# Altium PCB nrf52840_bma250e.PcbDoc
Units mm, origin at the board's own origin, x right, y up, seen from the top; angles counter-clockwise.
Board outline 19 x 51.31 mm, 2 copper layers (Top Layer, Bottom Layer), stack 0.325 mm thick; 26 components, 60 nets, 138 pads, 59 vias.
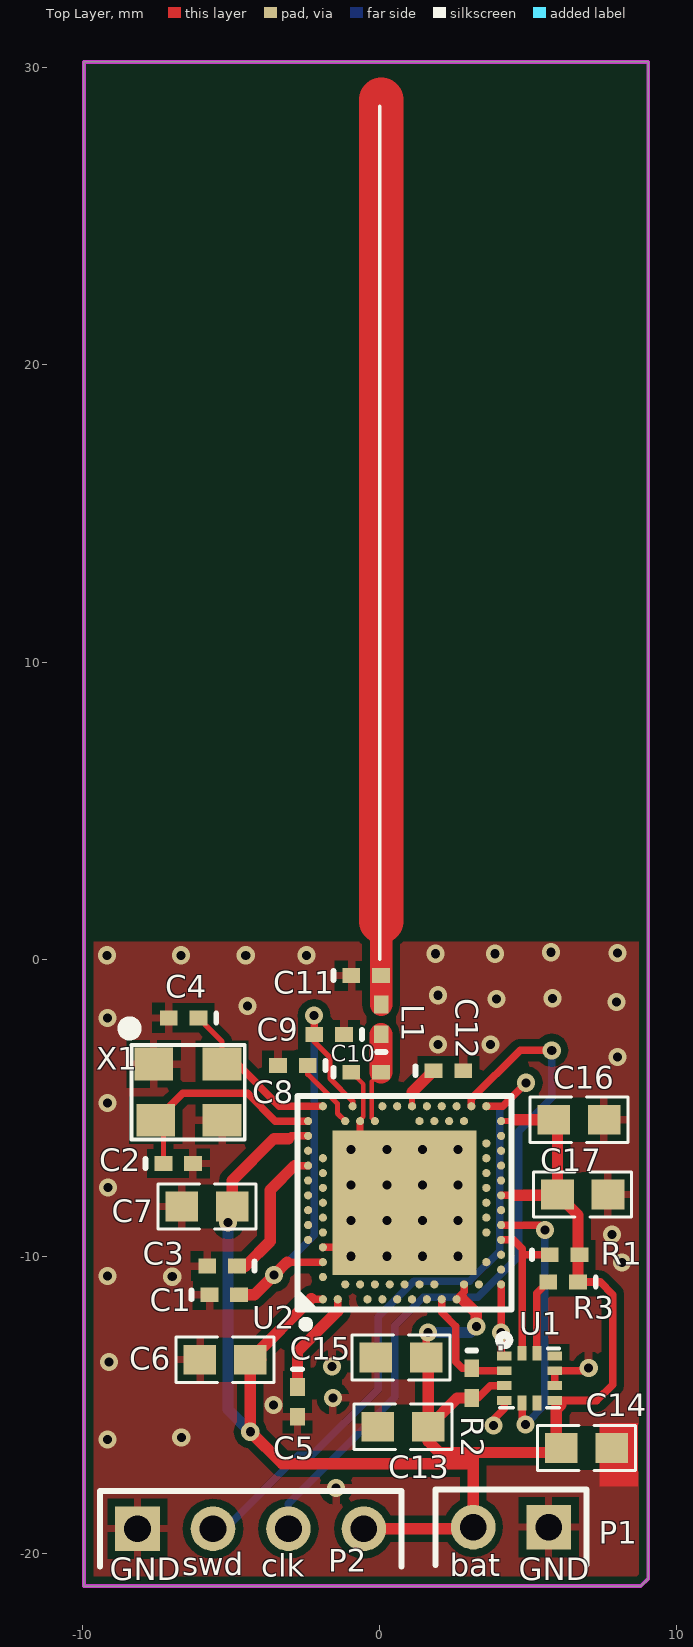
[diagram p0: Top Layer view]
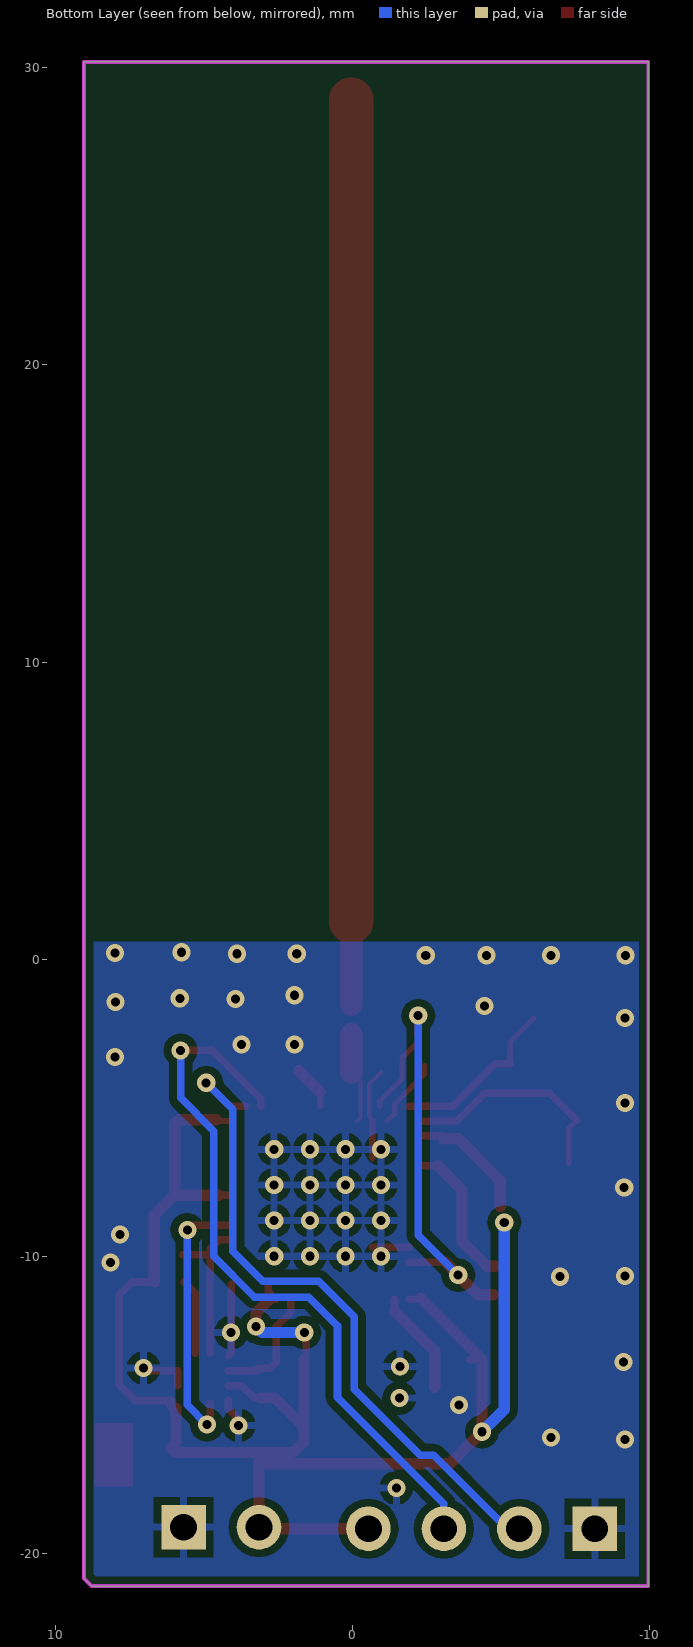
[diagram p1: Bottom Layer view, seen from below]

## Layer stack, top to bottom
Top Solder: solder mask 0.0102, Solder Resist, Dk 3.5
Top Layer: signal copper 0.0356
Dielectric 1: core 0.254, FR-4, Dk 4.2
Bottom Layer: signal copper 0.0356
Bottom Solder: solder mask 0.0102, Solder Resist, Dk 3.5

## Board outline
-9.957,-21.107 -9.957,30.201 9.043,30.201 9.043,-20.853 8.788,-21.107

## Design rules (kind name [scope] priority, off if disabled: settings)
Clearance [All] p1: gap=0.145
ComponentClearance [All] p1 off: gap=0.254 collisioncheckmode=3 verticalgap=0.254 showdistances=FALSE
Height [All] p1 off: minheight=0 maxheight=25.4 prefheight=12.7
MinimumSolderMaskSliver [All] p1 off: minsoldermaskwidth=0.254
NetAntennae [All] p1 off: netantennaetolerance=0
PolygonConnect [All] p1: connectstyle=Relief reliefconductorwidth=0.254 reliefentries=4 polygonreliefangle="90 Angle" airgapwidth=0.254
RoutingVias [All] p1: holewidth=0.711 width=1.27 viastyle="Through Hole" minholewidth=0.711 minwidth=1.27 maxholewidth=0.711 maxwidth=1.27
SilkToSilkClearance [All] p1 off: silktosilkclearance=0.254
SilkToSolderMaskClearance [IsPad] p1 off: minsilkscreentomaskgap=0.254 clearancetoexposedcopper=TRUE
SolderMaskExpansion [All] p1: expansion=0.102
Width [All] p1: maxlimit=2.54 minlimit=0.025 preferedwidth=0.254 minimp=50.000000 maximp=50.000000 favimp=50.000000
24 further rules are at their usual default settings.

## Components (designator, comment, footprint, x,y, rotation, side; value= is the part's Value field where it differs from the comment)
C1 "1.0µF" 0402-A -5.232,-11.303 r0 top
C2 "12pF" 0402-A -6.782,-6.883 r0 top
C3 "N.C." 0402-A -5.309,-10.338 r180 top
C4 "12pF" 0402-A -6.604,-1.981 r180 top
C5 "100nF" 0402-A -2.769,-14.91 r270 top
C6 "1.0µF" 0603-1 -5.207,-13.487 r180 top
C7 "100nF" 0603-1 -5.817,-8.331 r180 top
C8 "100pF" 0402-A -2.921,-3.581 r180 top
C9 "N.C." 0402-A -1.702,-2.54 r180 top
C10 "0.8pF" 0402-A -0.457,-3.81 r0 top
C11 "0.5pF" 0402-A -0.457,-0.559 r0 top
C12 "820pF" 0402-A 2.311,-3.759 r0 top
C13 "0.1uF" 0603-1 0.787,-15.748 r180 top
C14 "1uF" 0603-1 6.96,-16.459 r180 top
C15 "4.7µF" 0603-1 0.711,-13.411 r180 top
C16 "100nF" 0603-1 6.706,-5.41 r0 top
C17 "100nF" 0603-1 6.833,-7.925 r0 top
L1 "4.7nH" 0402-A 0.051,-2.032 r90 top
P1 "Header 2" HDR1X2 5.69,-19.126 r180 top
P2 "Header 4" HDR1X4 -8.153,-19.177 r0 top
R1 "10K" 0402-A 6.223,-9.957 r0 top
R2 "10K" 0402-A 3.099,-14.275 r270 top
R3 "10K" 0402-A 6.172,-10.871 r180 top
U1 "bma250e" bma250e 4.191,-13.36 r0 top
U2 "nRF52840-QIAA" AQFN50P700X700X85_HS-74N 0.838,-8.204 r90 top
X1 "32MHz" SMD3225 -5.309,-3.531 r180 top

## Footprints (in the part's own frame and the unit in brackets; to place one, negate y for a bottom-side part, rotate by r counter-clockwise, add the part's x,y. Pads: shape width x height; smd on the part's side, far side on the other; paste and mask are expansions set on the pad)
0402-A [mm] "Chip Inductor; Body 1 x 0.5 mm (LxW typ)"
  rect 0.6x0.5 smd: 1(-0.5,0) 2(0.5,0)
  silkscreen extent -1.1,-0.15 -1.1,0.15
0603-1 [mm] "贴片带丝印"
  rect 1.1x1 smd: 1(-0.85,0) 2(0.85,0)
  silkscreen extent -1.65,-0.76 1.65,0.76, body extent -1.14,-0.38 1.14,0.38, height 1
AQFN50P700X700X85_HS-74N [mm]
  rect 4.85x4.85 smd mask+0.05: 74(0,0)
  round 0.275 smd paste+0.012 mask+0.05: A8(-1.25,3.25) A10(-0.75,3.25) A12(-0.25,3.25) A14(0.25,3.25) A16(0.75,3.25) A18(1.25,3.25) A20(1.75,3.25) A22(2.25,3.25) A23(2.75,3.25) AA24(3.25,-2.25) AB2(-2.75,-2.5) AC5(-2,-2.75) AC9(-1,-2.75) AC11(-0.5,-2.75) AC13(0,-2.75) AC15(0.5,-2.75) AC17(1,-2.75) AC19(1.5,-2.75) AC21(2,-2.75) AC24(3.25,-2.75) AD2(-2.75,-3.25) AD4(-2.25,-3.25) AD6(-1.75,-3.25) AD8(-1.25,-3.25) AD10(-0.75,-3.25) AD12(-0.25,-3.25) AD14(0.25,-3.25) AD16(0.75,-3.25) AD18(1.25,-3.25) AD20(1.75,-3.25) AD22(2.25,-3.25) AD23(2.75,-3.25) B1(-3.25,2.75) B3(-2.5,2.75) B5(-2,2.75) B7(-1.5,2.75) B9(-1,2.75) B11(-0.5,2.75) B13(0,2.75) B15(0.5,2.75) B17(1,2.75) B19(1.5,2.75) B24(3.25,2.75) C1(-3.25,2.25) D2(-2.75,2) D23(2.75,2) E24(3.25,1.75) F2(-2.75,1.5) F23(2.75,1.5) G1(-3.25,1.25) H2(-2.75,1) H23(2.75,1) J1(-3.25,0.75) J24(3.25,0.75) K2(-2.75,0.5) L1(-3.25,0.25) L24(3.25,0.25) M2(-2.75,0) N1(-3.25,-0.25) N24(3.25,-0.25) P2(-2.75,-0.5) P23(2.75,-0.5) R1(-3.25,-0.75) R24(3.25,-0.75) T2(-2.75,-1) T23(2.75,-1) U1(-3.25,-1.25) U24(3.25,-1.25) V23(2.75,-1.5) W1(-3.25,-1.75) W24(3.25,-1.75) Y2(-2.75,-2) Y23(2.75,-2)
  silkscreen extent -4.21,-3.6 3.6,3.6, body extent -3.55,-3.55 3.55,3.55, height 0.85
bma250e [mm]
  rect 0.5x0.3 smd: 1(0,0) 2(0,-0.5) 3(0,-1) 4(0,-1.5) 7(1.7,-1.5) 8(1.7,-1) 9(1.7,-0.5) 10(1.7,0)
  rect 0.3x0.5 smd: 5(0.6,-1.59) 6(1.1,-1.59) 11(1.1,0.09) 12(0.6,0.09)
  silkscreen extent -0.15,-1.75 1.85,0.25
HDR1X2 [mm] "Connector; Header; 2 Position"
  rect 1.5x1.5 hole 0.9: 1(0,0)
  round 1.5 hole 0.9: 2(2.54,0)
  silkscreen extent -1.27,-1.27 3.81,1.27
HDR1X4 [mm] "Connector; Header; 4 Position"
  rect 1.5x1.5 hole 0.9: 1(0,0)
  round 1.5 hole 0.9: 2(2.54,0) 3(5.08,0) 4(7.62,0)
  silkscreen extent -1.27,-1.27 8.89,1.27
SMD3225 [mm]
  rect 1.3x1.1 smd: 1(0,0) 2(2.3,0) 3(2.23,1.9) 4(0,1.9)
  silkscreen extent -0.76,-1.32 3.24,2.54

## Part data
C1 C6: library part C0603-1μ0, "Capacitor, X7R, ±10%"
C2 C4: library part C0402-12p, "Capacitor, NP0, ±2%"
C3 C9: library part C0402-N.C., "Not mounted"
C5 C7 C16 C17: library part C0402-100n, "Capacitor, X7R, ±10%"
C8: library part C0402-100p, "Capacitor, NP0, ±5%"
C10: library part C0402-0.8p, "Capacitor, NP0, ±10%"
C11 C13 C14: library part C0402-0.5p, "Capacitor, NP0, ±10%"
C12: library part C0402-820p, "Capacitor, NP0, ±5%"
C15: library part C0603-4μ7-6.3V-X7R, "Capacitor, X7R, ±10%"
L1: library part L0402-4n7, "High frequency chip inductor ±5%"
P1: "Header, 2-Pin"
P2: "Header, 4-Pin"
R1 R2 R3: library part Res1, "Resistor"
U2: library part nRF52840-QIAAD0, "Multi-protocol Bluetooth Low Energy, IEEE 802.15.4, ANT and 2.4GHz proprietary system-on-chip"
X1: library part XTAL_SMD2016_32MHz_8pF_General, "XTAL SMD 2016, 32MHz, Cl=8pF, Total Tol: ±40ppm"

## Via types
v1: diameter 0.61, hole 0.305, Top Layer to Bottom Layer, 56 vias
v2: diameter 0.61, hole 0.305, Top Layer to Bottom Layer, tented both sides, 3 vias

## Nets (pads, with @x,y where several pads share a name; then routed paths per layer and width w, separated by ;. In a path a pad name is that pad's centre, name@x,y a point inside that pad or via, vN(x,y) a via of type N, cw(c..) or ccw(c..) an arc to the next point about the centre after c; other vN are vias at no path point)
DEC1: C5.1 U2.C1 | length 3.5
  Top Layer w0.254: -1.412,-11.851 U2.C1
  Top Layer w0.381: C5.1 -2.769,-13.208 -1.412,-11.851
DEC3: C8.1 U2.D23 | length 2.4
  Top Layer w0.178: C8.1 -2.421,-3.873 -1.422,-4.872 -1.422,-5.194 U2.D23
DEC4_6: C1.2 C9.2 U2.B5 U2.E24 | length 16.1
  Top Layer w0.178: C9.2 -2.202,-2.794 -1.676,-3.319 -1.676,-4.021 -0.912,-4.785 U2.E24
  Top Layer w0.254: -3.118,-10.204 U2.B5 ; C9.2 v1@-2.202,-1.913
  Top Layer w0.381: C1.2 -4.216,-11.303 v1(-3.556,-10.643) -3.118,-10.204
  Bottom Layer w0.254: v1(-3.556,-10.643) -2.21,-9.296 v1(-2.21,-1.905)
GND: C1.1 C2.2 C3.2 C4.2 C5.2 C6.2 C7.2 C8.2 C9.1 C10.1 C11.1 C12.2 C13.2 C14.1 C15.2 C16.2 C17.2 P1.1 P2.1 U1.1 U1.4 U1.8 U1.9 U2.74 U2.AD2 U2.B7 U2.F23 X1.2 X1.4 | length 9.5
  Top Layer w0.145: C10.1 -0.557,-4.21 -0.557,-5.309 -0.662,-5.414 U2.F23
  Top Layer w0.229: U2.74@-0.662,-6.704 U2.F23
  Top Layer w0.254: U2.B7 U2.74@-0.662,-9.704 ; v1(3.835,-15.697) 3.835,-15.494 4.191,-15.138 U1.4 ; U2.AD2 4.088,-13.258 U1.1 ; U1.8 U1.9 6.942,-13.86 v1(7.036,-13.767)
  other v1: -1.473,-17.805 -9.169,-16.18 -6.68,-16.104 -3.581,-15.011 -1.575,-14.783 -1.6,-13.716 -9.119,-13.564 4.088,-12.573 -6.985,-10.693 -9.169,-10.668 8.153,-10.211 -0.962,-10.004 0.238,-10.004 1.438,-10.004 2.638,-10.004 7.823,-9.271 -0.962,-8.804 0.238,-8.804 1.438,-8.804 2.638,-8.804 -9.144,-7.696 -0.962,-7.604 0.238,-7.604 1.438,-7.604 2.638,-7.604 -0.962,-6.404 0.238,-6.404 1.438,-6.404 2.638,-6.404 -9.169,-4.851 8.001,-3.302 1.956,-2.87 3.734,-2.87 -9.169,-1.981 -4.445,-1.575 7.976,-1.448 3.937,-1.346 5.817,-1.321 1.956,-1.219 -2.464,0.127 1.88,0.178 3.886,0.178 8.001,0.203 5.766,0.229
  other v2: -9.185,0.127 -6.685,0.127 -4.51,0.127
NetC3_1: C3.1 U2.A18 | length 4.8
  Top Layer w0.254: -2.865,-6.954 U2.A18
  Top Layer w0.381: C3.1 -4.521,-10.338 -3.683,-9.5 -3.683,-7.772 -2.865,-6.954
NetC10_2: C10.2 L1.1 U2.H23 | length 3.1
  Top Layer w0.145: U2.H23 -0.267,-5.349 -0.267,-4.12 C10.2
  Top Layer w0.762: C10.2 L1.1@0.043,-2.54
NetC12_1: C12.1 U2.N24 | length 1.5
  Top Layer w0.203: U2.N24 1.088,-4.482
  Top Layer w0.381: 1.088,-4.482 C12.1
NetR3_2: R3.2 U1.11 | length 2.6
  Top Layer w0.254: U1.11 5.291,-11.252 R3.2
P0.02/AIN0: U2.A12
P0.03/AIN1: U2.B13
P0.04/AIN2: U2.J1
P0.05/AIN3: U2.K2
P0.06: U2.L1
P0.07: U2.M2
P0.08: U2.N1
P0.09/NFC1: U2.L24
P0.10/NFC2: U2.J24
P0.11: U2.T2
P0.12: R2.1 U1.2 U2.U1 | length 4
  Top Layer w0.254: U2.U1 2.088,-11.893 2.565,-12.37 2.565,-13.564 2.777,-13.775 R2.1 ; R2.1@3.184,-13.775 3.184,-13.86 U1.2
P0.13: R1.1 U1.12 U2.AD8 | length 5.3
  Top Layer w0.254: U2.AD8 4.496,-9.454 4.791,-9.749 U1.12 ; 4.816,-9.957 R1.1
P0.14: U2.AC9
P0.15: U1.5 U2.AD10 | length 9.1
  Top Layer w0.254: U2.AD10 5.398,-8.954 v1(5.563,-9.119) ; U1.5 4.791,-15.561 v1(4.902,-15.672)
  Bottom Layer w0.254: v1(4.902,-15.672) 5.563,-15.011 v1(5.563,-9.119)
P0.16: U2.AC11
P0.17: U2.AD12
P0.18/RESET: U2.AC13
P0.19: U2.AC15
P0.20: U2.AD16
P0.21: U2.AC17
P0.22: U2.AD18
P0.23: U2.AC19
P0.24: U2.AD20
P0.25: U2.AC21
P0.26: U2.G1
P0.27: U2.H2
P0.28/AIN4: U2.B11
P0.29/AIN5: U2.A10
P0.30/AIN6: U2.B9
P0.31/AIN7: U2.A8
P1.00: U2.AD22
P1.01: U2.Y23
P1.02: U2.W24
P1.03: U2.V23
P1.04: U2.U24
P1.05: U2.T23
P1.06: U2.R24
P1.07: U2.P23
P1.08: U2.P2
P1.09: U2.R1
P1.10: U2.A20
P1.11: U2.B19
P1.12: U2.B17
P1.13: U2.A16
P1.14: U2.B15
P1.15: U2.A14
RF: C11.2 L1.2 | length 30.5
  Top Layer w0.762: L1.2 0.051,1.27
  Top Layer w1.5: 0.051,1.27 0.051,28.931
SWDCLK: P2.3 U2.AA24 | length 24.5
  Top Layer w0.254: U2.AA24 3.088,-4.71 4.724,-3.073 v1(5.791,-3.073)
  Bottom Layer w0.254: P2.3 -3.073,-18.339 0.508,-14.757 0.508,-12.344 1.473,-11.379 3.302,-11.379 4.674,-10.008 4.674,-5.791 5.791,-4.674 v1(5.791,-3.073)
SWDIO: P2.2 U2.AC24 | length 22.7
  Top Layer w0.254: U2.AC24 4.139,-4.954 v1(4.928,-4.166)
  Bottom Layer w0.254: P2.2 -5.207,-19.177 -2.74,-16.71 -2.282,-16.71 -0.051,-14.478 -0.051,-12.04 1.143,-10.846 3.023,-10.846 4.039,-9.83 4.039,-5.055 v1(4.928,-4.166)
VDD_NRF: C6.1 C7.1 C13.1 C14.2 C15.1 C16.1 C17.1 P1.2 P2.4 R1.2 R2.2 R3.1 U1.3 U1.7 U2.A22 U2.AD14 U2.AD23 U2.B1 U2.W1 U2.Y2 | length 63.9
  Top Layer w0.203: U2.AD23 4.591,-5.454
  Top Layer w0.254: C6.1 C6.1@-3.945,-13.487 ; -3.073,-6.045 -2.982,-5.954 U2.A22 ; -2.3,-11.43 -2.275,-11.454 U2.B1 ; C15.1 v1@1.561,-12.637 ; U2.W1 2.838,-11.204 U2.Y2 ; R2.2 3.31,-14.775 3.724,-14.36 U1.3 ; U2.AD14 4.496,-7.954 ; U1.7@6.096,-14.86 7.314,-14.86 7.849,-14.326 7.849,-11.303 7.417,-10.871 R3.1
  Top Layer w0.381: C7.1 -4.967,-7.456 -3.556,-6.045 -3.073,-6.045 ; -2.3,-11.43 C6.1 v1(-4.357,-15.912) -3.277,-16.993 3.15,-16.993 ; P2.4 P1.2@3.099,-19.177 ; C15.1@1.637,-13.487 C13.1 ; 2.794,-11.455 3.251,-11.913 v1(3.251,-12.37) ; R2.2 2.611,-14.775 C13.1 ; P1.2 3.15,-16.993 ; 4.496,-7.954 5.953,-7.954 C17.1 ; 4.591,-5.41 C16.1 5.983,-5.537 C17.1 ; 6.096,-15.011 5.994,-15.113 5.944,-15.113 5.944,-16.293 C14.2 5.957,-16.612 3.15,-16.612 ; R3.1 6.672,-8.614 C17.1 ; C13.1 1.637,-16.242 2.007,-16.612 3.15,-16.612 ; 3.15,-16.993 3.15,-16.612
  Bottom Layer w0.381: v1(-5.105,-8.865) -5.105,-15.164 v1(-4.357,-15.912) ; v1(1.626,-12.573) 3.048,-12.573 v1(3.251,-12.37)
XC1: C4.1 U2.B24 X1.1 | length 5.9
  Top Layer w0.178: C4.1 -5.309,-2.777 X1.1
  Top Layer w0.254: X1.1 -4.801,-3.531 -3.377,-4.954 U2.B24
XC2: C2.1 U2.A23 X1.3 | length 7.4
  Top Layer w0.178: X1.3 -7.282,-5.687 C2.1
  Top Layer w0.254: X1.3 -6.629,-4.521 -4.445,-4.521 -3.512,-5.454 U2.A23
pads on no net: U1.6 U1.10 U2.AB2 U2.AC5 U2.AD4 U2.AD6 U2.B3 U2.D2 U2.F2

## Polygon pours and split planes (outlines as drawn)
GND on Top Layer "Top Solder-No Net" (solid, remove dead copper, pour order 14): -10.516,0.584 15.418,0.584 15.418,-22.377 14.707,-23.089 14.605,-22.987 -12.217,-22.987
GND on Bottom Layer "Top Solder-No Net" (solid, remove dead copper, pour order 16): -10.541,0.584 15.316,0.584 15.494,0.406 15.316,0.229 15.316,-23.012 -10.033,-23.012 -11.455,-21.59

## Keep-outs
Keep-Out Layer:
  lines w0.127: -9.957,-21.107 -9.957,30.201 9.043,30.201 9.043,-20.625 9.043,-20.853 8.788,-21.107 -9.957,-21.107

## Other copper
Top Layer:
  rectangle net GND: 7.391,-17.755 8.687,-15.621

## Silkscreen, mask and mechanical layers (free items; w line width, h text height)
Top Overlay:
  circle w0.254: c4.191,-12.827 r0.18
  lines w0.127: 0,0 0,28.7
  text "swd" at -6.655,-20.752 h0.76
  text "bat" at 2.362,-20.777 h0.76
  text "clk" at -3.988,-20.803 h0.76
  text "GND" at -9.093,-20.904 h0.76
  text "GND" at 4.674,-20.904 h0.76
Top Solder:
  rectangle: -9.957,0.66 9.043,30.201
  lines w1.5: 0.051,1.27 0.051,28.931
Bottom Solder:
  rectangle: -9.957,0.66 9.043,30.201